# EAGLE board AllOfTheAbove7x_Edits (EAGLE 7.7.0)

Size 180.66 x 105.08 mm. Coordinates in mm from the lower left corner, seen from the top.
Copper layers (1*16): Top 0.035mm / dielectric 1.5mm / Bottom 0.035mm
Design rules "default": minimum track width 6mil, minimum drill 0.35mm, track to track 6mil, track to pad 6mil, pad to pad 6mil, via to via 6mil, smd to smd 6mil, copper to edge 40mil, drill to drill 6mil, minimum pad ring 10mil, minimum via ring 8mil, stop-mask expansion 4mil, vias tented up to drill 0mil, thermal gap 10mil
Net classes: 1 power: width 0.381 mm

## Footprints (pad centres in the part's own frame; a part is rotated, then mirrored left to right if it is on the bottom)
C0603 = smd 0.889 x 0.889: 1 -0.762,0; 2 0.762,0
CASE-A_3216 = smd 1.27 x 1.27: + -1.27,0; - 1.27,0
DO-214AC = smd 2.5 x 1.7: 1 -2,0; 2 2,0
LL-34 = smd 1.524 x 1.676: A -1.524,0; C 1.524,0
SO08 = smd 0.6 x 2.2: 1 -1.905,-2.6; 2 -0.635,-2.6; 3 0.635,-2.6; 4 1.905,-2.6; 5 1.905,2.6; 6 0.635,2.6; 7 -0.635,2.6; 8 -1.905,2.6
1X03 = drill 1.016 long: 1 -2.54,0; 2 0,0; 3 2.54,0
ALPS_POT_SQUAREHOLES = drill 1: P$1 -2.5,-7.5; P$2 0,-7.5; P$3 2.58,-7.5 | smd 2.5 x 2: P$4 -4.75,0; P$5 4.75,0 | smd 2.5 x 2 bottom: P$6 -4.75,0; P$7 4.75,0
R0603 = smd 0.889 x 0.889: 1 -0.762,0; 2 0.762,0
153CLV-0505 = smd 3 x 1.6: + 2.2,0; - -2.2,0
SOT23-BEC = smd 1 x 1.4: B -0.95,-1.1; C 0,1.1; E 0.95,-1.1
TO252 = smd 1 x 1.6: 1 -2.28,-4.8; 2 2.28,-4.8 | smd 5.4 x 6.2: 3 0,2.5
TSSOP14 = smd 0.305 x 0.991: 1 -1.95,-2.918; 2 -1.3,-2.918; 3 -0.65,-2.918; 4 0,-2.918; 5 0.65,-2.918; 6 1.3,-2.918; 7 1.95,-2.918; 8 1.95,2.918; 9 1.3,2.918; 10 0.65,2.918; 11 0,2.918; 12 -0.65,2.918; 13 -1.3,2.918; 14 -1.95,2.918
SO16 = smd 0.6 x 2.2: 1 -4.445,-2.6; 2 -3.175,-2.6; 3 -1.905,-2.6; 4 -0.635,-2.6; 5 0.635,-2.6; 6 1.905,-2.6; 7 3.175,-2.6; 8 4.445,-2.6; 9 4.445,2.6; 10 3.175,2.6; 11 1.905,2.6; 12 0.635,2.6; 13 -0.635,2.6; 14 -1.905,2.6; 15 -3.175,2.6; 16 -4.445,2.6
3.5MM-JACK-SWITCH-13MM-NOHOLES = smd 1.95 x 3.85 bottom: RING_B@1 -3.7,0; SWITCH_B@1 3.7,0 | smd 1.95 x 3.85: RING_T@3 -3.7,0; SWITCH_T@3 3.7,0 | smd 3.85 x 1.95 bottom: SECOND_B@1 0,-3.5; TIP_B@1 0,4.5 | smd 3.85 x 1.95: SECOND_T@3 0,-3.5; TIP_T@3 0,4.5
2X3-SHROUDED = drill 1.016 pad 1.88 octagon: 1 -1.27,2.54; 2 1.27,2.54; 3 -1.27,0; 4 1.27,0; 5 -1.27,-2.54; 6 1.27,-2.54
TC33X = smd 1.2 x 1.2: 1 -1,-1.825; 3 1,-1.825 | smd 1.5 x 1.6: 2 0,1.5
POWER_16_SHROUDED = drill 1.016 pad 1.88 square: 1 -8.89,-1.27 | drill 1.016 pad 1.88: 2 -8.89,1.27; 3 -6.35,-1.27; 4 -6.35,1.27; 5 -3.81,-1.27; 6 -3.81,1.27; 7 -1.27,-1.27; 8 -1.27,1.27; 9 1.27,-1.27; 10 1.27,1.27; 11 3.81,-1.27; 12 3.81,1.27; 13 6.35,-1.27; 14 6.35,1.27; 15 8.89,-1.27; 16 8.89,1.27
SOT-323 = smd 0.7 x 0.9: ANODE -0.65,-0.95; CATHODE 0,0.95; NC 0.65,-0.95
SOT23 = smd 1 x 1.4: 1 -0.95,-1.1; 2 0.95,-1.1; 3 0,1.1
POWERTESTPAD = drill 1 pad 2: P$1 0,0 | smd 2 x 1.5: P$2 0,-0.75 | smd 2 x 1.5 bottom: P$3 0,-0.75
BYPASSBOARD = drill 0.8 long: 12V 31.75,15.24; GND 34.29,5.08; GND2 138.43,15.24; GND3 140.97,5.08 | drill 0.8 square: P$1 31.75,5.08 | drill 0.8: P$2 31.75,10.16; P$3 31.75,7.62; P$4 31.75,12.7; P$5 34.29,15.24; P$6 34.29,10.16; P$7 34.29,12.7; P$8 34.29,7.62; P$9 104.14,5.08; P$10 104.14,10.16; P$11 104.14,7.62; P$12 104.14,12.7; P$13 138.43,5.08; P$14 138.43,10.16; P$15 138.43,7.62; P$16 138.43,12.7; P$17 140.97,15.24; P$18 140.97,10.16; P$19 140.97,12.7; P$20 140.97,7.62
GROUNDLOOP = drill 0.8 offset: P$1 1.27,0; P$2 -1.27,0
FENIXINTERNALCONNECTIONPAD = smd 0.635 x 1.27 bottom: P$1 0,0
TESTPAD_DUAL_PTH = drill 0.8 square: P$1 -1.27,0 | drill 0.8: P$2 1.27,0
SOT23' = smd 0.6 x 0.7: P$1 -0.85,-1; P$2 0.85,-1; P$3 0,1

## Placement (x,y rotation side)
C1  100n  [C0603]  not placed on the board
C2  100n  [C0603]  not placed on the board
C3  10u  [CASE-A_3216]  not placed on the board
C4  10u  [CASE-A_3216]  not placed on the board
C5  [C0603]  not placed on the board
C6  [C0603]  not placed on the board
C7  [CASE-A_3216]  not placed on the board
C8  [CASE-A_3216]  not placed on the board
C9  100n  [C0603]  not placed on the board
C10  100n  [C0603]  not placed on the board
C11  100n  [C0603]  not placed on the board
C12  100n  [C0603]  not placed on the board
D1  1n4001  [DO-214AC]  not placed on the board
D2  1n4001  [DO-214AC]  not placed on the board
DIST+1:C22  1nF  [C0603]  not placed on the board
DIST+1:C23  10nF  [C0603]  not placed on the board
DIST+1:C24  100n  [C0603]  not placed on the board
DIST+1:C25  100n  [C0603]  not placed on the board
DIST+1:C26  47nF  [C0603]  not placed on the board
DIST+1:C27  1uF  [C0603]  not placed on the board
DIST+1:C28  1nF  [C0603]  not placed on the board
DIST+1:D11  1n34a  [LL-34]  not placed on the board
DIST+1:D12  1n34a  [LL-34]  not placed on the board
DIST+1:IC5  UA741D  [SO08]  not placed on the board
DIST+1:JP4  [1X03]  not placed on the board
DIST+1:JP5  [1X03]  not placed on the board
DIST+1:JP6  [1X03]  not placed on the board
DIST+1:R22  10KB  [ALPS_POT_SQUAREHOLES]  40.3,37.64 0 top
DIST+1:R23  1MC  [ALPS_POT_SQUAREHOLES]  40.3,57.96 0 top
DIST+1:R24  10K  [ALPS_POT_SQUAREHOLES]  40.3,78.28 0 top
DIST+1:R25  10K  [R0603]  not placed on the board
DIST+1:R26  4.7K  [R0603]  not placed on the board
DIST+1:R27  1M  [R0603]  not placed on the board
DIST+1:R28  5.6K  [R0603]  not placed on the board
DIST+1:R72  1M  [R0603]  not placed on the board
FUZZFACE1:C1  20uF  [153CLV-0505]  not placed on the board
FUZZFACE1:C28  2.2uF  [153CLV-0505]  not placed on the board
FUZZFACE1:C42  10nF  [C0603]  not placed on the board
FUZZFACE1:JP1  [1X03]  not placed on the board
FUZZFACE1:JP2  [1X03]  not placed on the board
FUZZFACE1:Q1  MMBT3906LT1SMD  [SOT23-BEC]  not placed on the board
FUZZFACE1:Q2  MMBT3906LT1SMD  [SOT23-BEC]  not placed on the board
FUZZFACE1:R41  100K  [R0603]  not placed on the board
FUZZFACE1:R42  500KA  [ALPS_POT_SQUAREHOLES]  91.1,65.58 0 top
FUZZFACE1:R43  1KB  [ALPS_POT_SQUAREHOLES]  91.1,40.18 0 top
FUZZFACE1:R44  8.2K  [R0603]  not placed on the board
FUZZFACE1:R45  33K  [R0603]  not placed on the board
FUZZFACE1:R46  470R  [R0603]  not placed on the board
IC1  7809DT  [TO252]  83.48,24.94 180 top
IC2  TL074TSSOP14  [TSSOP14]  not placed on the board
IC6  TL074TSSOP14  [TSSOP14]  not placed on the board
INPUTS1:C1  100n  [C0603]  not placed on the board
INPUTS1:C2  100n  [C0603]  not placed on the board
INPUTS1:C3  10uF  [153CLV-0505]  not placed on the board
INPUTS1:C4  10pF  [C0603]  not placed on the board
INPUTS1:C9  100n  [C0603]  not placed on the board
INPUTS1:C10  100n  [C0603]  not placed on the board
INPUTS1:C22  10pF  [C0603]  not placed on the board
INPUTS1:C23  10pF  [C0603]  not placed on the board
INPUTS1:C24  47pF  [C0603]  not placed on the board
INPUTS1:C26  100n  [C0603]  not placed on the board
INPUTS1:C27  100n  [C0603]  not placed on the board
INPUTS1:C28  10uF  [153CLV-0505]  not placed on the board
INPUTS1:C29  10uF  [153CLV-0505]  not placed on the board
INPUTS1:D15  [LL-34]  not placed on the board
INPUTS1:D17  1N4148  [LL-34]  not placed on the board
INPUTS1:IC1  TL072  [SO08]  not placed on the board
INPUTS1:IC2  TL072  [SO08]  not placed on the board
INPUTS1:IC5  LM13700M  [SO16]  not placed on the board
INPUTS1:IC6  TL072  [SO08]  not placed on the board
INPUTS1:J1  JACK  [3.5MM-JACK-SWITCH-13MM-NOHOLES]  7.28,42.72 0 top
INPUTS1:J17  JACK  [3.5MM-JACK-SWITCH-13MM-NOHOLES]  7.28,27.48 0 top
INPUTS1:Q1  MMBT3906LT1SMD  [SOT23-BEC]  not placed on the board
INPUTS1:R1  100K  [R0603]  not placed on the board
INPUTS1:R2  100K  [R0603]  not placed on the board
INPUTS1:R3  100k  [R0603]  not placed on the board
INPUTS1:R4  4.7K  [R0603]  not placed on the board
INPUTS1:R5  10R  [R0603]  not placed on the board
INPUTS1:R6  10R  [R0603]  not placed on the board
INPUTS1:R7  100K  [R0603]  not placed on the board
INPUTS1:R8  100K  [R0603]  not placed on the board
INPUTS1:R9  330K  [R0603]  not placed on the board
INPUTS1:R10  1K  [R0603]  not placed on the board
INPUTS1:R11  100k  [R0603]  not placed on the board
INPUTS1:R22  1M  [R0603]  not placed on the board
INPUTS1:R23  150K  [R0603]  not placed on the board
INPUTS1:R24  10K  [R0603]  not placed on the board
INPUTS1:R25  470R  [R0603]  not placed on the board
INPUTS1:R26  1K  [R0603]  not placed on the board
INPUTS1:R27  100K  [R0603]  not placed on the board
INPUTS1:R28  1K  [R0603]  not placed on the board
INPUTS1:R30  10K  [R0603]  not placed on the board
INPUTS1:R31  100K  [R0603]  not placed on the board
INPUTS1:R32  100K  [R0603]  not placed on the board
INPUTS1:R33  330K  [R0603]  not placed on the board
INPUTS1:R69  100K Linear  [ALPS_POT_SQUAREHOLES]  19.98,42.72 0 top
INPUTS1:U$13  HEADPHONE  [2X3-SHROUDED]  not placed on the board
INPUTS1:U$17  100k  [TC33X]  not placed on the board
INPUTS1:U$18  100k  [TC33X]  not placed on the board
J1  JACK  [3.5MM-JACK-SWITCH-13MM-NOHOLES]  174.92,27.48 0 top
J2  POWERSHROUDED  [POWER_16_SHROUDED]  70.78,13.51 270 bottom
J3  JACK  [3.5MM-JACK-SWITCH-13MM-NOHOLES]  174.92,63.04 0 top
J4  JACK  [3.5MM-JACK-SWITCH-13MM-NOHOLES]  45.38,98.6 0 top
J5  JACK  [3.5MM-JACK-SWITCH-13MM-NOHOLES]  55.54,96.06 0 top
J6  JACK  [3.5MM-JACK-SWITCH-13MM-NOHOLES]  9.82,98.6 0 top
J7  JACK  [3.5MM-JACK-SWITCH-13MM-NOHOLES]  30.14,98.6 0 top
J8  JACK  [3.5MM-JACK-SWITCH-13MM-NOHOLES]  19.98,96.06 0 top
J9  JACK  [3.5MM-JACK-SWITCH-13MM-NOHOLES]  65.7,98.6 0 top
J10  JACK  [3.5MM-JACK-SWITCH-13MM-NOHOLES]  174.92,78.28 0 top
J11  JACK  [3.5MM-JACK-SWITCH-13MM-NOHOLES]  80.94,98.6 0 top
J12  JACK  [3.5MM-JACK-SWITCH-13MM-NOHOLES]  91.1,96.06 0 top
J13  JACK  [3.5MM-JACK-SWITCH-13MM-NOHOLES]  101.26,98.6 0 top
J14  JACK  [3.5MM-JACK-SWITCH-13MM-NOHOLES]  116.5,98.6 0 top
J15  JACK  [3.5MM-JACK-SWITCH-13MM-NOHOLES]  126.66,96.06 0 top
J16  JACK  [3.5MM-JACK-SWITCH-13MM-NOHOLES]  136.82,98.6 0 top
J17  JACK  [3.5MM-JACK-SWITCH-13MM-NOHOLES]  152.06,98.6 0 top
J18  JACK  [3.5MM-JACK-SWITCH-13MM-NOHOLES]  162.22,96.06 0 top
J19  JACK  [3.5MM-JACK-SWITCH-13MM-NOHOLES]  172.38,98.6 0 top
MUFF1:C1  1uF  [153CLV-0505]  not placed on the board
MUFF1:C2  1uF  [153CLV-0505]  not placed on the board
MUFF1:C28  1uF  [153CLV-0505]  not placed on the board
MUFF1:C44  470pF  [C0603]  not placed on the board
MUFF1:C45  1uF  [C0603]  not placed on the board
MUFF1:C46  100nF  [C0603]  not placed on the board
MUFF1:C47  470pF  [C0603]  not placed on the board
MUFF1:C49  100nF  [C0603]  not placed on the board
MUFF1:C50  470pF  [C0603]  not placed on the board
MUFF1:C52  4nF  [C0603]  not placed on the board
MUFF1:C53  100nF  [C0603]  not placed on the board
MUFF1:C54  100nF  [C0603]  not placed on the board
MUFF1:C55  10nF  [C0603]  not placed on the board
MUFF1:D1  BAS16W  [SOT-323]  not placed on the board
MUFF1:D2  BAS16W  [SOT-323]  not placed on the board
MUFF1:D3  BAS16W  [SOT-323]  not placed on the board
MUFF1:D4  BAS16W  [SOT-323]  not placed on the board
MUFF1:R47  39K  [R0603]  not placed on the board
MUFF1:R48  47K  [R0603]  not placed on the board
MUFF1:R49  470K  [R0603]  not placed on the board
MUFF1:R50  100R  [R0603]  not placed on the board
MUFF1:R51  10K  [R0603]  not placed on the board
MUFF1:R52  1K  [R0603]  not placed on the board
MUFF1:R53  10K  [R0603]  not placed on the board
MUFF1:R54  100K  [R0603]  not placed on the board
MUFF1:R55  150R  [R0603]  not placed on the board
MUFF1:R56  470K  [R0603]  not placed on the board
MUFF1:R57  10K  [R0603]  not placed on the board
MUFF1:R58  10K  [R0603]  not placed on the board
MUFF1:R59  100K  [R0603]  not placed on the board
MUFF1:R60  150R  [R0603]  not placed on the board
MUFF1:R61  470K  [R0603]  not placed on the board
MUFF1:R62  10K  [R0603]  not placed on the board
MUFF1:R63  39K  [R0603]  not placed on the board
MUFF1:R64  22K  [R0603]  not placed on the board
MUFF1:R65  100K  [R0603]  not placed on the board
MUFF1:R66  430K  [R0603]  not placed on the board
MUFF1:R67  15K  [R0603]  not placed on the board
MUFF1:R68  3.3K  [R0603]  not placed on the board
MUFF1:R69  100KB  [ALPS_POT_SQUAREHOLES]  116.5,75.74 0 top
MUFF1:R70  100KB  [ALPS_POT_SQUAREHOLES]  116.5,30.02 0 top
MUFF1:R71  100KB  [ALPS_POT_SQUAREHOLES]  116.5,52.88 0 top
MUFF1:T1  2n3904  [SOT23-BEC]  not placed on the board
MUFF1:T2  2n3904  [SOT23-BEC]  not placed on the board
MUFF1:T3  2n3904  [SOT23-BEC]  not placed on the board
MUFF1:T4  2n3904  [SOT23-BEC]  not placed on the board
PCB1  EURORACK_PCB5STOMP  [EURORACK36HP_5STOMP]  -0.34,-3 0 top
R1  100k  [R0603]  not placed on the board
R2  100k  [R0603]  not placed on the board
R3  100k  [R0603]  not placed on the board
R4  100k  [R0603]  not placed on the board
R5  100k  [R0603]  not placed on the board
R6  100k  [R0603]  not placed on the board
R7  100k  [R0603]  not placed on the board
R8  100k  [R0603]  not placed on the board
R9  100k  [R0603]  not placed on the board
R10  100k  [R0603]  not placed on the board
R11  100k  [R0603]  not placed on the board
R12  100k  [R0603]  not placed on the board
R13  100k  [R0603]  not placed on the board
R14  100k  [R0603]  not placed on the board
R15  100k  [R0603]  not placed on the board
R16  100k  [R0603]  not placed on the board
R17  100k  [R0603]  not placed on the board
R18  100k  [R0603]  not placed on the board
R19  100k  [R0603]  not placed on the board
R20  100k  [R0603]  not placed on the board
R21  100k  [R0603]  not placed on the board
R22  100k  [R0603]  not placed on the board
R23  100k  [R0603]  not placed on the board
R24  100k  [R0603]  not placed on the board
R25  100k  [R0603]  91.1,35.1 0 top
R26  100k  [R0603]  86.02,37.64 0 top
RAT1:C1  4.7uF  [153CLV-0505]  not placed on the board
RAT1:C2  2.2uF  [153CLV-0505]  not placed on the board
RAT1:C3  4.7uF  [153CLV-0505]  not placed on the board
RAT1:C28  1uF  [153CLV-0505]  not placed on the board
RAT1:C29  22nF  [C0603]  not placed on the board
RAT1:C30  1nF  [C0603]  not placed on the board
RAT1:C31  100pF  [C0603]  not placed on the board
RAT1:C35  3.3nF  [C0603]  not placed on the board
RAT1:C36  22nF  [C0603]  not placed on the board
RAT1:C38  100n  [C0603]  not placed on the board
RAT1:C39  100n  [C0603]  not placed on the board
RAT1:D1  BAS16W  [SOT-323]  not placed on the board
RAT1:D2  BAS16W  [SOT-323]  not placed on the board
RAT1:IC6  UA741D  [SO08]  not placed on the board
RAT1:JP1  [1X03]  not placed on the board
RAT1:JP2  [1X03]  not placed on the board
RAT1:JP3  [1X03]  not placed on the board
RAT1:Q1  SST201  [SOT23]  not placed on the board
RAT1:R29  100KA  [ALPS_POT_SQUAREHOLES]  65.7,75.74 0 top
RAT1:R30  100KA  [ALPS_POT_SQUAREHOLES]  65.7,30.02 0 top
RAT1:R31  100KA  [ALPS_POT_SQUAREHOLES]  65.7,52.88 0 top
RAT1:R32  1M  [R0603]  not placed on the board
RAT1:R33  1K  [R0603]  not placed on the board
RAT1:R34  1M  [R0603]  not placed on the board
RAT1:R35  560R  [R0603]  not placed on the board
RAT1:R36  47R  [R0603]  not placed on the board
RAT1:R37  1K  [R0603]  not placed on the board
RAT1:R38  1.5K  [R0603]  not placed on the board
RAT1:R39  1M  [R0603]  not placed on the board
RAT1:R40  10K  [R0603]  not placed on the board
U$13  VOLTAGETESTPAD  [POWERTESTPAD]  91.1,32.56 0 top
U$22  5STOMPBOARD  [BYPASSBOARD]  4.74,-3 0 top
U$23  HEADPHONEHOLE_BIGGAP  [HEADPHONEHOLE_GAP]  9.82,73.2 180 top
U$41  VOLTAGETESTPAD  [POWERTESTPAD]  96.18,40.18 0 top
U$42  VOLTAGETESTPAD  [POWERTESTPAD]  88.56,32.56 0 top
U$43  VOLTAGETESTPAD  [POWERTESTPAD]  83.48,32.56 0 top
U$44  VOLTAGETESTPAD  [POWERTESTPAD]  86.02,32.56 0 top
U$48  GNDLOOP  [GROUNDLOOP]  177.46,2.08 180 top
U$49  GNDLOOP  [GROUNDLOOP]  177.46,98.6 0 top
U$50  GNDLOOP  [GROUNDLOOP]  4.74,2.08 180 top
VCA1:C1  100n  [C0603]  not placed on the board
VCA1:C2  100n  [C0603]  not placed on the board
VCA1:C9  100n  [C0603]  not placed on the board
VCA1:C10  100n  [C0603]  not placed on the board
VCA1:C22  10pF  [C0603]  not placed on the board
VCA1:D17  1N4148  [LL-34]  not placed on the board
VCA1:IC5  LM13700M  [SO16]  not placed on the board
VCA1:IC6  TL072  [SO08]  not placed on the board
VCA1:Q1  MMBT3906LT1SMD  [SOT23-BEC]  not placed on the board
VCA1:R22  4.7K  [R0603]  not placed on the board
VCA1:R23  10R  [R0603]  not placed on the board
VCA1:R24  10R  [R0603]  not placed on the board
VCA1:R25  100K  [R0603]  not placed on the board
VCA1:R26  100K  [R0603]  not placed on the board
VCA1:R27  100K  [R0603]  not placed on the board
VCA1:R28  1K  [R0603]  not placed on the board
VCA1:R30  10K  [R0603]  not placed on the board
VCA1:R31  100K  [R0603]  not placed on the board
VCA1:R32  100K  [R0603]  not placed on the board
VCA1:R33  330K  [R0603]  not placed on the board
VCA1:R69  [ALPS_POT_SQUAREHOLES]  162.22,63.04 0 top
VCA1:U$7  100k  [TC33X]  not placed on the board
VCA1:U$8  100k  [TC33X]  not placed on the board
WAVESHAPER1:12V  POWER12V  [FENIXINTERNALCONNECTIONPAD]  not placed on the board
WAVESHAPER1:-12V  POWER-12V  [FENIXINTERNALCONNECTIONPAD]  not placed on the board
WAVESHAPER1:C1  100n  [C0603]  not placed on the board
WAVESHAPER1:C2  100n  [C0603]  not placed on the board
WAVESHAPER1:C3  100n  [C0603]  not placed on the board
WAVESHAPER1:C4  100n  [C0603]  not placed on the board
WAVESHAPER1:C5  100n  [C0603]  not placed on the board
WAVESHAPER1:C6  100n  [C0603]  not placed on the board
WAVESHAPER1:C7  33p  [C0603]  not placed on the board
WAVESHAPER1:C8  220p  [C0603]  not placed on the board
WAVESHAPER1:C9  33p  [C0603]  not placed on the board
WAVESHAPER1:C10  33p  [C0603]  not placed on the board
WAVESHAPER1:C11  33p  [C0603]  not placed on the board
WAVESHAPER1:C12  33p  [C0603]  not placed on the board
WAVESHAPER1:C13  100n  [C0603]  not placed on the board
WAVESHAPER1:C14  680n  [C0603]  not placed on the board
WAVESHAPER1:C15  33p FIX  [C0603]  not placed on the board
WAVESHAPER1:C16  33p FIX  [C0603]  not placed on the board
WAVESHAPER1:C24  100n  [C0603]  not placed on the board
WAVESHAPER1:C25  100n  [C0603]  not placed on the board
WAVESHAPER1:D1  BAS16W  [SOT-323]  not placed on the board
WAVESHAPER1:D2  BAS16W  [SOT-323]  not placed on the board
WAVESHAPER1:D3  BAS16W  [SOT-323]  not placed on the board
WAVESHAPER1:D4  BAS16W  [SOT-323]  not placed on the board
WAVESHAPER1:D5  BAS16W  [SOT-323]  not placed on the board
WAVESHAPER1:D6  BAS16W  [SOT-323]  not placed on the board
WAVESHAPER1:D7  BAS16W  [SOT-323]  not placed on the board
WAVESHAPER1:D8  BAS16W  [SOT-323]  not placed on the board
WAVESHAPER1:D9  BAS16W  [SOT-323]  not placed on the board
WAVESHAPER1:D10  BAS16W  [SOT-323]  not placed on the board
WAVESHAPER1:D11  BAS16W  [SOT-323]  not placed on the board
WAVESHAPER1:D12  BAS16W  [SOT-323]  not placed on the board
WAVESHAPER1:GND  POWERGND  [FENIXINTERNALCONNECTIONPAD]  not placed on the board
WAVESHAPER1:IC1  TL074TSSOP14  [TSSOP14]  not placed on the board
WAVESHAPER1:IC2  TL074TSSOP14  [TSSOP14]  not placed on the board
WAVESHAPER1:IC3  LM13700M  [SO16]  not placed on the board
WAVESHAPER1:IC5  TL072  [SO08]  not placed on the board
WAVESHAPER1:J1  JACK  [3.5MM-JACK-SWITCH-13MM-NOHOLES]  136.82,78.28 0 top
WAVESHAPER1:J2  JACK  [3.5MM-JACK-SWITCH-13MM-NOHOLES]  146.98,78.28 0 top
WAVESHAPER1:J3  JACK  [3.5MM-JACK-SWITCH-13MM-NOHOLES]  174.92,42.72 0 top
WAVESHAPER1:Q2  MMBT3906LT1SMD  [SOT23-BEC]  not placed on the board
WAVESHAPER1:R1  100KB Lin  [ALPS_POT_SQUAREHOLES]  141.9,57.96 0 top
WAVESHAPER1:R2  10KB Lin  [ALPS_POT_SQUAREHOLES]  141.9,37.64 0 top
WAVESHAPER1:R3  1k  [R0603]  not placed on the board
WAVESHAPER1:R4  14  [R0603]  not placed on the board
WAVESHAPER1:R5  470K  [R0603]  not placed on the board
WAVESHAPER1:R6  4K7  [R0603]  not placed on the board
WAVESHAPER1:R7  100  [R0603]  not placed on the board
WAVESHAPER1:R8  100  [R0603]  not placed on the board
WAVESHAPER1:R9  470K  [R0603]  not placed on the board
WAVESHAPER1:R10  22K  [R0603]  not placed on the board
WAVESHAPER1:R11  33K  [R0603]  not placed on the board
WAVESHAPER1:R12  4M7  [R0603]  not placed on the board
WAVESHAPER1:R13  10K  [R0603]  not placed on the board
WAVESHAPER1:R14  47K  [R0603]  not placed on the board
WAVESHAPER1:R15  33K  [R0603]  not placed on the board
WAVESHAPER1:R16  33K  [R0603]  not placed on the board
WAVESHAPER1:R17  100K  [R0603]  not placed on the board
WAVESHAPER1:R18  100K  [R0603]  not placed on the board
WAVESHAPER1:R19  100K  [R0603]  not placed on the board
WAVESHAPER1:R20  100K  [R0603]  not placed on the board
WAVESHAPER1:R21  100K  [R0603]  not placed on the board
WAVESHAPER1:R22  100  [R0603]  not placed on the board
WAVESHAPER1:R23  100K  [R0603]  not placed on the board
WAVESHAPER1:R24  10K  [R0603]  not placed on the board
WAVESHAPER1:R25  220K  [R0603]  not placed on the board
WAVESHAPER1:R26  10K  [R0603]  not placed on the board
WAVESHAPER1:R27  6K8  [R0603]  not placed on the board
WAVESHAPER1:R28  100K  [R0603]  not placed on the board
WAVESHAPER1:R29  33K  [R0603]  not placed on the board
WAVESHAPER1:R30  100K  [R0603]  not placed on the board
WAVESHAPER1:R31  33K  [R0603]  not placed on the board
WAVESHAPER1:R32  100K  [R0603]  not placed on the board
WAVESHAPER1:R33  33K  [R0603]  not placed on the board
WAVESHAPER1:R34  33K  [R0603]  not placed on the board
WAVESHAPER1:R35  100K  [R0603]  not placed on the board
WAVESHAPER1:R36  100K  [R0603]  not placed on the board
WAVESHAPER1:R37  27k  [R0603]  not placed on the board
WAVESHAPER1:R38  150k  [R0603]  not placed on the board
WAVESHAPER1:R39  1k  [R0603]  not placed on the board
WAVESHAPER1:R40  200k  [R0603]  not placed on the board
WAVESHAPER1:R41  200k  [R0603]  not placed on the board
WAVESHAPER1:R42  47k  [R0603]  not placed on the board
WAVESHAPER1:R43  47k  [R0603]  not placed on the board
WAVESHAPER1:R44  2.2k  [R0603]  not placed on the board
WAVESHAPER1:R45  18k  [R0603]  not placed on the board
WAVESHAPER1:R46  18k  [R0603]  not placed on the board
WAVESHAPER1:R47  10k  [ALPS_POT_SQUAREHOLES]  162.22,42.72 0 top
WAVESHAPER1:R48  14k  [R0603]  not placed on the board
WAVESHAPER1:T1  3906  [SOT23-BEC]  not placed on the board
WAVESHAPER1:U$3  TESTPOINT_DUAL_PTH  [TESTPAD_DUAL_PTH]  not placed on the board
WAVESHAPER1:U$11  BAT54S  [SOT23']  not placed on the board
WAVESHAPER1:U$24  50K  [TC33X]  not placed on the board
WAVESHAPER1:WSOUT  SIGNALOUT  [FENIXINTERNALCONNECTIONPAD]  not placed on the board

## Library data of the parts
C1 C2 C5 C6 C9-C12 D1 D2 DIST+1:C22-DIST+1:C28 DIST+1:D11 DIST+1:D12 DIST+1:R25-DIST+1:R28 DIST+1:R72 FUZZFACE1:C42 FUZZFACE1:R41 FUZZFACE1:R44-FUZZFACE1:R46 INPUTS1:C1 INPUTS1:C2 INPUTS1:C4 INPUTS1:C9 INPUTS1:C10 INPUTS1:C22-INPUTS1:C24 INPUTS1:C26 INPUTS1:C27 INPUTS1:D15 INPUTS1:D17 INPUTS1:R1-INPUTS1:R11 INPUTS1:R22-INPUTS1:R28 INPUTS1:R30-INPUTS1:R33 MUFF1:C44-MUFF1:C47 MUFF1:C49 MUFF1:C50 MUFF1:C52-MUFF1:C55 MUFF1:R47-MUFF1:R68 R1-R26 RAT1:C29-RAT1:C31 RAT1:C35 RAT1:C36 RAT1:C38 RAT1:C39 RAT1:R32-RAT1:R40 VCA1:C1 VCA1:C2 VCA1:C9 VCA1:C10 VCA1:C22 VCA1:D17 VCA1:R22-VCA1:R28 VCA1:R30-VCA1:R33 WAVESHAPER1:C1-WAVESHAPER1:C16 WAVESHAPER1:C24 WAVESHAPER1:C25 WAVESHAPER1:R3-WAVESHAPER1:R46 WAVESHAPER1:R48 = OPL
C3 C4 C7 C8 IC2 IC6 INPUTS1:IC1 INPUTS1:IC2 INPUTS1:IC6 J2 PCB1 U$22 U$23 VCA1:IC6 WAVESHAPER1:IC1 WAVESHAPER1:IC2 WAVESHAPER1:IC5 = EurorackModularParts
DIST+1:IC5 RAT1:IC6 = linear
DIST+1:JP4-DIST+1:JP6 FUZZFACE1:JP1 FUZZFACE1:JP2 RAT1:JP1-RAT1:JP3 = pinhead
DIST+1:R22 MUFF1:R70 RAT1:R30 = EurorackModularParts; DESC: Tone
DIST+1:R23 FUZZFACE1:R43 MUFF1:R71 RAT1:R31 = EurorackModularParts; DESC: Distortion
DIST+1:R24 FUZZFACE1:R42 MUFF1:R69 RAT1:R29 = EurorackModularParts; DESC: Volume
FUZZFACE1:C1 FUZZFACE1:C28 INPUTS1:C3 INPUTS1:C28 INPUTS1:C29 INPUTS1:U$17 INPUTS1:U$18 MUFF1:C1 MUFF1:C2 MUFF1:C28 RAT1:C1-RAT1:C3 RAT1:C28 VCA1:U$7 VCA1:U$8 = adafruit
FUZZFACE1:Q1 FUZZFACE1:Q2 INPUTS1:Q1 VCA1:Q1 WAVESHAPER1:Q2 = transistor-pnp
IC1 = adafruit@1
INPUTS1:IC5 VCA1:IC5 WAVESHAPER1:IC3 = ota
INPUTS1:J1 = EurorackModularParts; DESC: Drive CV
INPUTS1:J17 = EurorackModularParts; DESC: Master Input
INPUTS1:R69 = EurorackModularParts; DESC: Drive
INPUTS1:U$13 = SparkFun-Connectors
J1 = EurorackModularParts; DESC: Cross Output
J3 = EurorackModularParts; DESC: Master Output
J4 = EurorackModularParts; DESC: Input B
J5 = EurorackModularParts; DESC: Difference B
J6 = EurorackModularParts; DESC: Input A
J7 = EurorackModularParts; DESC: Output A
J8 = EurorackModularParts; DESC: Difference A
J9 = EurorackModularParts; DESC: Output B
J10 = EurorackModularParts; DESC: Master Difference
J11 = EurorackModularParts; DESC: Input C
J12 = EurorackModularParts; DESC: Difference C
J13 = EurorackModularParts; DESC: Output C
J14 = EurorackModularParts; DESC: Input D
J15 = EurorackModularParts; DESC: Difference D
J16 = EurorackModularParts; DESC: Output D
J17 = EurorackModularParts; DESC: Input E
J18 = EurorackModularParts; DESC: Difference E
J19 = EurorackModularParts; DESC: Output E
MUFF1:D1-MUFF1:D4 RAT1:D1 RAT1:D2 U$48-U$50 WAVESHAPER1:12V WAVESHAPER1:-12V WAVESHAPER1:D1-WAVESHAPER1:D12 WAVESHAPER1:GND WAVESHAPER1:U$3 WAVESHAPER1:U$11 WAVESHAPER1:WSOUT = FenixBase
MUFF1:T1-MUFF1:T4 = transistor-neu-to92
RAT1:Q1 = transistor-fet
U$13 = FenixBase; DESC: 12V
U$41 = FenixBase; DESC: -12V
U$42 = FenixBase; DESC: 9V
U$43 = FenixBase; DESC: GND
U$44 = FenixBase; DESC: 4.5V
VCA1:R69 = EurorackModularParts; DESC: Post-gain
WAVESHAPER1:J1 WAVESHAPER1:R1 = EurorackModularParts; DESC: Mod
WAVESHAPER1:J2 = EurorackModularParts; DESC: Bias
WAVESHAPER1:J3 WAVESHAPER1:R47 = EurorackModularParts; DESC: Wet/Dry
WAVESHAPER1:R2 = EurorackModularParts; DESC: Level
WAVESHAPER1:T1 = transistor
WAVESHAPER1:U$24 = adafruit; DESC: Offset

## Nets
4.5V: DIST+1:R72.2 R25.1 R26.2 RAT1:R34.2 U$44.P$1 U$44.P$2 U$44.P$3
9V: C5.2 C7.+ DIST+1:JP4.1 FUZZFACE1:C1.+ FUZZFACE1:JP2.3 FUZZFACE1:Q1.E FUZZFACE1:R42.P$1 FUZZFACE1:R43.P$1 IC1.2 MUFF1:R51.1 MUFF1:R57.1 MUFF1:R62.1 MUFF1:R66.2 MUFF1:R67.2 R25.2 RAT1:JP2.1 RAT1:Q1.1 U$42.P$1 U$42.P$2 U$42.P$3
12V: C1.2 C3.+ C6.2 C8.+ C9.2 C11.2 D1.2 DIST+1:C24.2 DIST+1:JP4.3 IC1.1 IC2.4 IC6.4 INPUTS1:C1.2 INPUTS1:C9.2 INPUTS1:C26.2 INPUTS1:IC1.8 INPUTS1:IC2.8 INPUTS1:IC5.11 INPUTS1:IC6.8 INPUTS1:J1.SWITCH_B@1 INPUTS1:J1.SWITCH_T@3 INPUTS1:U$17.3 INPUTS1:U$18.3 RAT1:C38.2 RAT1:JP2.3 U$13.P$1 U$13.P$2 U$13.P$3 U$22.12V WAVESHAPER1:12V.P$1 WAVESHAPER1:C1.2 WAVESHAPER1:C3.2 WAVESHAPER1:C5.2 WAVESHAPER1:C24.2 WAVESHAPER1:IC1.4 WAVESHAPER1:IC2.4 WAVESHAPER1:IC3.11 WAVESHAPER1:IC5.8 WAVESHAPER1:R2.P$3 WAVESHAPER1:R48.1 WAVESHAPER1:U$24.1
-12V: C2.1 C4.- C10.1 C12.1 D2.1 DIST+1:C25.1 DIST+1:JP5.3 IC2.11 IC6.11 INPUTS1:C2.1 INPUTS1:C10.1 INPUTS1:C27.1 INPUTS1:IC1.4 INPUTS1:IC2.4 INPUTS1:IC5.6 INPUTS1:IC6.4 INPUTS1:U$17.1 INPUTS1:U$18.1 RAT1:C39.1 RAT1:JP3.3 U$41.P$1 U$41.P$2 U$41.P$3 WAVESHAPER1:-12V.P$1 WAVESHAPER1:C2.1 WAVESHAPER1:C4.1 WAVESHAPER1:C6.1 WAVESHAPER1:C25.1 WAVESHAPER1:IC1.11 WAVESHAPER1:IC2.11 WAVESHAPER1:IC3.6 WAVESHAPER1:IC5.4 WAVESHAPER1:R9.2 WAVESHAPER1:R12.1 WAVESHAPER1:U$24.3
DIST+1:N$20: DIST+1:C23.2 DIST+1:R25.2
DIST+1:N$21: DIST+1:IC5.3 DIST+1:JP6.2 DIST+1:R25.1
DIST+1:N$22: DIST+1:C26.2 DIST+1:IC5.2 DIST+1:R27.1
DIST+1:N$23: DIST+1:C26.1 DIST+1:R26.1
DIST+1:N$32: DIST+1:C27.1 DIST+1:IC5.6 DIST+1:R27.2
DIST+1:N$33: DIST+1:R23.P$3 DIST+1:R26.2
DIST+1:N$34: DIST+1:C28.2 DIST+1:D11.C DIST+1:D12.A DIST+1:R22.P$3 DIST+1:R24.P$3
DIST+1:N$35: DIST+1:C27.2 DIST+1:R28.2
DIST+1:N$36: DIST+1:R22.P$1 DIST+1:R22.P$2 DIST+1:R28.1
DIST+1:N$81: DIST+1:IC5.7 DIST+1:JP4.2
DIST+1:N$82: DIST+1:IC5.4 DIST+1:JP5.2
DIST+1:N$87: DIST+1:JP6.1 DIST+1:R72.1
FUZZFACE1:N$53: FUZZFACE1:JP1.3 FUZZFACE1:Q2.E FUZZFACE1:R41.1 FUZZFACE1:R43.P$3
FUZZFACE1:N$54: FUZZFACE1:C28.- FUZZFACE1:JP2.2 FUZZFACE1:Q1.B FUZZFACE1:R41.2
FUZZFACE1:N$55: FUZZFACE1:JP1.2 FUZZFACE1:JP2.1 FUZZFACE1:Q1.C FUZZFACE1:Q2.B FUZZFACE1:R45.2
FUZZFACE1:N$56: FUZZFACE1:C1.- FUZZFACE1:R43.P$2
FUZZFACE1:N$57: FUZZFACE1:C42.2 FUZZFACE1:R42.P$3
FUZZFACE1:N$58: FUZZFACE1:C42.1 FUZZFACE1:R44.1 FUZZFACE1:R46.2
FUZZFACE1:N$59: FUZZFACE1:JP1.1 FUZZFACE1:Q2.C FUZZFACE1:R44.2
GND: C1.1 C2.2 C3.- C4.+ C5.1 C6.1 C7.- C8.- C9.1 C10.2 C11.1 C12.2 DIST+1:C22.2 DIST+1:C24.1 DIST+1:C25.2 DIST+1:C28.1 DIST+1:D11.A DIST+1:D12.C DIST+1:JP5.1 DIST+1:R23.P$1 DIST+1:R23.P$2 DIST+1:R24.P$1 FUZZFACE1:R45.1 FUZZFACE1:R46.1 IC1.3 INPUTS1:C1.1 INPUTS1:C2.2 INPUTS1:C3.- INPUTS1:C9.1 INPUTS1:C10.2 INPUTS1:C23.1 INPUTS1:C26.1 INPUTS1:C27.2 INPUTS1:C29.- INPUTS1:IC6.5 INPUTS1:J1.RING_B@1 INPUTS1:J1.RING_T@3 INPUTS1:J17.RING_B@1 INPUTS1:J17.RING_T@3 INPUTS1:J17.SWITCH_B@1 INPUTS1:J17.SWITCH_T@3 INPUTS1:R5.1 INPUTS1:R6.2 INPUTS1:R8.2 INPUTS1:R9.1 INPUTS1:R22.1 INPUTS1:R23.1 INPUTS1:R30.1 INPUTS1:R69.P$1 INPUTS1:U$13.3 INPUTS1:U$13.4 J1.RING_B@1 J1.RING_T@3 J2.3 J2.4 J2.5 J2.6 J2.7 J2.8 J3.RING_B@1 J3.RING_T@3 J4.RING_B@1 J4.RING_T@3 J5.RING_B@1 J5.RING_T@3 J6.RING_B@1 J6.RING_T@3 J7.RING_B@1 J7.RING_T@3 J8.RING_B@1 J8.RING_T@3 J9.RING_B@1 J9.RING_T@3 J10.RING_B@1 J10.RING_T@3 J11.RING_B@1 J11.RING_T@3 J12.RING_B@1 J12.RING_T@3 J13.RING_B@1 J13.RING_T@3 J14.RING_B@1 J14.RING_T@3 J15.RING_B@1 J15.RING_T@3 J16.RING_B@1 J16.RING_T@3 J17.RING_B@1 J17.RING_T@3 J18.RING_B@1 J18.RING_T@3 J19.RING_B@1 J19.RING_T@3 MUFF1:C55.1 MUFF1:R48.1 MUFF1:R50.2 MUFF1:R52.2 MUFF1:R54.1 MUFF1:R55.1 MUFF1:R59.1 MUFF1:R60.1 MUFF1:R64.2 MUFF1:R65.1 MUFF1:R68.1 MUFF1:R69.P$1 R1.2 R5.2 R9.2 R13.2 R17.2 R21.2 R26.1 RAT1:C2.- RAT1:C3.- RAT1:C30.1 RAT1:C35.2 RAT1:C38.1 RAT1:C39.2 RAT1:D1.ANODE RAT1:D2.CATHODE RAT1:JP3.1 RAT1:R29.P$1 RAT1:R32.2 RAT1:R39.1 RAT1:R40.1 U$22.GND U$22.GND2 U$22.GND3 U$43.P$1 U$43.P$2 U$43.P$3 U$48.P$1 U$48.P$2 U$49.P$1 U$49.P$2 U$50.P$1 U$50.P$2 WAVESHAPER1:C1.1 WAVESHAPER1:C2.2 WAVESHAPER1:C3.1 WAVESHAPER1:C4.2 WAVESHAPER1:C5.1 WAVESHAPER1:C6.2 WAVESHAPER1:C24.1 WAVESHAPER1:C25.2 WAVESHAPER1:D1.CATHODE WAVESHAPER1:D3.CATHODE WAVESHAPER1:D5.CATHODE WAVESHAPER1:D9.CATHODE WAVESHAPER1:D10.CATHODE WAVESHAPER1:D11.ANODE WAVESHAPER1:D12.ANODE WAVESHAPER1:GND.P$1 WAVESHAPER1:IC1.5 WAVESHAPER1:IC1.10 WAVESHAPER1:IC3.7 WAVESHAPER1:IC3.10 WAVESHAPER1:IC5.3 WAVESHAPER1:IC5.5 WAVESHAPER1:J1.RING_B@1 WAVESHAPER1:J1.RING_T@3 WAVESHAPER1:J2.RING_B@1 WAVESHAPER1:J2.RING_T@3 WAVESHAPER1:J2.SWITCH_B@1 WAVESHAPER1:J2.SWITCH_T@3 WAVESHAPER1:J3.RING_B@1 WAVESHAPER1:J3.RING_T@3 WAVESHAPER1:J3.SWITCH_B@1 WAVESHAPER1:J3.SWITCH_T@3 WAVESHAPER1:R1.P$1 WAVESHAPER1:R2.P$1 WAVESHAPER1:R3.1 WAVESHAPER1:R4.2 WAVESHAPER1:R5.2 WAVESHAPER1:R7.1 WAVESHAPER1:R8.1 WAVESHAPER1:R24.2 WAVESHAPER1:R25.1 WAVESHAPER1:R26.1 WAVESHAPER1:R39.1 WAVESHAPER1:R47.P$1 WAVESHAPER1:U$3.P$2
INPUT_A: J6.TIP_B@1 J6.TIP_T@3 R3.2 U$22.P$3
INPUT_B: J4.TIP_B@1 J4.TIP_T@3 U$22.P$7
INPUT_C: J11.TIP_B@1 J11.TIP_T@3 U$22.P$11
INPUT_D: J14.TIP_B@1 J14.TIP_T@3 U$22.P$15
INPUT_E: J17.TIP_B@1 J17.TIP_T@3 U$22.P$19
INPUTS1:ENVELOPE_OUT: INPUTS1:R10.1
INPUTS1:EURORACK_IN: INPUTS1:J17.TIP_B@1 INPUTS1:J17.TIP_T@3 INPUTS1:R3.1
INPUTS1:GUITAR_IN: INPUTS1:C28.- INPUTS1:R22.2 INPUTS1:U$13.5 INPUTS1:U$13.6
INPUTS1:GUITAR_OUT: INPUTS1:R1.2 INPUTS1:R26.2
INPUTS1:MIX_OUT: INPUTS1:D15.A INPUTS1:IC2.1 INPUTS1:IC2.2 INPUTS1:R4.1
INPUTS1:N$1: INPUTS1:C4.2 INPUTS1:IC1.7 INPUTS1:R2.2 INPUTS1:R11.2
INPUTS1:N$2: INPUTS1:IC1.5 INPUTS1:R3.2
INPUTS1:N$3: INPUTS1:IC2.6 INPUTS1:IC2.7 INPUTS1:R10.2
INPUTS1:N$4: INPUTS1:IC5.4 INPUTS1:R6.1 INPUTS1:R7.1
INPUTS1:N$5: INPUTS1:IC5.3 INPUTS1:R4.2 INPUTS1:R5.2
INPUTS1:N$6: INPUTS1:IC5.5 INPUTS1:IC6.3 INPUTS1:R8.1
INPUTS1:N$7: INPUTS1:C22.1 INPUTS1:IC6.2 INPUTS1:R27.1
INPUTS1:N$8: INPUTS1:C3.+ INPUTS1:D15.C INPUTS1:IC2.5 INPUTS1:R9.2
INPUTS1:N$10: INPUTS1:C4.1 INPUTS1:IC1.6 INPUTS1:R11.1
INPUTS1:N$20: INPUTS1:C23.2 INPUTS1:C28.+ INPUTS1:IC1.3 INPUTS1:R23.2
INPUTS1:N$21: INPUTS1:C29.+ INPUTS1:R25.1
INPUTS1:N$22: INPUTS1:C24.1 INPUTS1:IC1.1 INPUTS1:R24.2 INPUTS1:R26.1
INPUTS1:N$23: INPUTS1:C24.2 INPUTS1:IC1.2 INPUTS1:R24.1 INPUTS1:R25.2
INPUTS1:N$32: INPUTS1:R7.2 INPUTS1:U$18.2
INPUTS1:N$33: INPUTS1:C22.2 INPUTS1:IC6.1 INPUTS1:R27.2 INPUTS1:R28.1
INPUTS1:N$36: INPUTS1:D17.A INPUTS1:IC6.7 INPUTS1:Q1.B
INPUTS1:N$37: INPUTS1:D17.C INPUTS1:IC6.6 INPUTS1:R31.1 INPUTS1:R32.2 INPUTS1:R33.2
INPUTS1:N$38: INPUTS1:Q1.E INPUTS1:R30.2 INPUTS1:R31.2
INPUTS1:N$39: INPUTS1:IC5.1 INPUTS1:Q1.C
INPUTS1:N$40: INPUTS1:R33.1 INPUTS1:U$17.2
INPUTS1:N$42: INPUTS1:R32.1 INPUTS1:R69.P$2
INPUTS1:VCA_CV_IN: INPUTS1:J1.TIP_B@1 INPUTS1:J1.TIP_T@3 INPUTS1:R69.P$3
INPUTS1:VCA_SIG_IN: INPUTS1:IC2.3 INPUTS1:R1.1 INPUTS1:R2.1
MASTERINPUT: INPUTS1:R28.2 J6.SWITCH_B@1 J6.SWITCH_T@3 WAVESHAPER1:R40.2 WAVESHAPER1:R42.1
MUFF1:N$1: MUFF1:C28.- MUFF1:R47.2
MUFF1:N$61: MUFF1:C28.+ MUFF1:C44.1 MUFF1:R48.2 MUFF1:R49.2 MUFF1:T1.B
MUFF1:N$62: MUFF1:R50.1 MUFF1:T1.E
MUFF1:N$63: MUFF1:C44.2 MUFF1:C45.1 MUFF1:R49.1 MUFF1:R51.2 MUFF1:T1.C
MUFF1:N$64: MUFF1:C45.2 MUFF1:R71.P$3
MUFF1:N$65: MUFF1:C1.- MUFF1:C47.1 MUFF1:R53.2 MUFF1:R54.2 MUFF1:R56.2 MUFF1:T2.B
MUFF1:N$66: MUFF1:C1.+ MUFF1:D1.ANODE MUFF1:D2.CATHODE
MUFF1:N$67: MUFF1:R55.2 MUFF1:T2.E
MUFF1:N$68: MUFF1:C47.2 MUFF1:C49.1 MUFF1:D1.CATHODE MUFF1:D2.ANODE MUFF1:R56.1 MUFF1:R57.2 MUFF1:T2.C
MUFF1:N$69: MUFF1:C49.2 MUFF1:R58.1
MUFF1:N$70: MUFF1:C2.- MUFF1:C50.1 MUFF1:R58.2 MUFF1:R59.2 MUFF1:R61.2 MUFF1:T3.B
MUFF1:N$71: MUFF1:R60.2 MUFF1:T3.E
MUFF1:N$72: MUFF1:C50.2 MUFF1:C52.1 MUFF1:D3.ANODE MUFF1:D4.CATHODE MUFF1:R61.1 MUFF1:R62.2 MUFF1:R63.1 MUFF1:T3.C
MUFF1:N$73: MUFF1:C53.1 MUFF1:R70.P$2
MUFF1:N$74: MUFF1:C55.2 MUFF1:R63.2 MUFF1:R70.P$1
MUFF1:N$75: MUFF1:C52.2 MUFF1:R64.1 MUFF1:R70.P$3
MUFF1:N$76: MUFF1:C2.+ MUFF1:D3.CATHODE MUFF1:D4.ANODE
MUFF1:N$77: MUFF1:C53.2 MUFF1:R65.2 MUFF1:R66.1 MUFF1:T4.B
MUFF1:N$78: MUFF1:C54.1 MUFF1:R67.1 MUFF1:T4.C
MUFF1:N$79: MUFF1:R68.2 MUFF1:T4.E
MUFF1:N$80: MUFF1:C54.2 MUFF1:R69.P$3
MUFF1:N$84: MUFF1:R52.1 MUFF1:R71.P$1
MUFF1:N$85: MUFF1:C46.2 MUFF1:R53.1
MUFF1:N$86: MUFF1:C46.1 MUFF1:R71.P$2
N$1: J1.TIP_B@1 J1.TIP_T@3 WAVESHAPER1:IC5.1 WAVESHAPER1:R43.1
N$2: D1.1 J2.9 J2.10
N$3: D2.2 J2.1 J2.2
N$4: DIST+1:C22.1 DIST+1:C23.1 U$22.P$4
N$5: DIST+1:R24.P$2 U$22.P$2
N$6: RAT1:C29.1 RAT1:R32.1 U$22.P$8
N$7: RAT1:R29.P$2 U$22.P$6
N$8: FUZZFACE1:C28.+ U$22.P$12
N$9: FUZZFACE1:R42.P$2 U$22.P$10
N$10: MUFF1:R47.1 U$22.P$16
N$11: MUFF1:R69.P$2 U$22.P$14
N$12: U$22.P$20 WAVESHAPER1:R37.2
N$13: U$22.P$18 WAVESHAPER1:R22.1 WAVESHAPER1:R23.1 WAVESHAPER1:WSOUT.P$1
N$15: IC2.5 R1.1 R2.1
N$16: IC2.6 R3.1 R4.2
N$18: IC2.7 J8.TIP_B@1 J8.TIP_T@3 R4.1
N$19: IC2.3 R5.1 R6.1
N$20: IC2.2 R7.1 R8.2
N$21: R6.2
N$22: R7.2
N$23: IC2.1 R8.1
N$24: IC2.10 R9.1 R10.1
N$25: IC2.9 R11.1 R12.2
N$26: R10.2
N$27: R11.2
N$28: IC2.8 R12.1
N$29: IC2.12 R13.1 R14.1
N$30: IC2.13 R15.1 R16.2
N$31: R14.2
N$32: R15.2
N$33: IC2.14 R16.1
N$34: IC6.5 R17.1 R18.1
N$35: IC6.6 R19.1 R20.2
N$36: R18.2
N$37: R19.2
N$38: IC6.7 R20.1
N$39: IC6.3 R21.1 R22.1
N$40: IC6.2 R23.1 R24.2
N$41: R22.2
N$42: R23.2
N$43: IC6.1 R24.1
OUTPUT_A: J4.SWITCH_B@1 J4.SWITCH_T@3 J7.TIP_B@1 J7.TIP_T@3 R2.2 U$22.P$1
OUTPUT_B: J9.TIP_B@1 J9.TIP_T@3 J11.SWITCH_B@1 J11.SWITCH_T@3 U$22.P$5
OUTPUT_C: J13.TIP_B@1 J13.TIP_T@3 J14.SWITCH_B@1 J14.SWITCH_T@3 U$22.P$9
OUTPUT_C1: J17.SWITCH_B@1 J17.SWITCH_T@3
OUTPUT_D: J16.TIP_B@1 J16.TIP_T@3 U$22.P$13
OUTPUT_E: J3.TIP_B@1 J3.TIP_T@3 J19.TIP_B@1 J19.TIP_T@3 U$22.P$17 WAVESHAPER1:R41.2
RAT1:N$37: RAT1:C29.2 RAT1:JP1.2 RAT1:R33.1
RAT1:N$38: RAT1:C30.2 RAT1:IC6.3 RAT1:R33.2
RAT1:N$39: RAT1:IC6.7 RAT1:JP2.2
RAT1:N$40: RAT1:IC6.4 RAT1:JP3.2
RAT1:N$41: RAT1:JP1.1 RAT1:R34.1
RAT1:N$42: RAT1:C31.1 RAT1:IC6.2 RAT1:R31.P$1 RAT1:R31.P$2 RAT1:R35.2 RAT1:R36.2
RAT1:N$43: RAT1:C1.+ RAT1:C31.2 RAT1:IC6.6 RAT1:R31.P$3
RAT1:N$44: RAT1:C1.- RAT1:R37.1
RAT1:N$45: RAT1:D1.CATHODE RAT1:D2.ANODE RAT1:R30.P$1 RAT1:R30.P$2 RAT1:R37.2
RAT1:N$46: RAT1:R30.P$3 RAT1:R38.1
RAT1:N$47: RAT1:C2.+ RAT1:R36.1
RAT1:N$48: RAT1:C3.+ RAT1:R35.1
RAT1:N$49: RAT1:C35.1 RAT1:C36.1 RAT1:R38.2
RAT1:N$50: RAT1:C36.2 RAT1:Q1.3 RAT1:R39.2
RAT1:N$51: RAT1:C28.+ RAT1:Q1.2 RAT1:R40.2
RAT1:N$52: RAT1:C28.- RAT1:R29.P$3
VCA1:12V: VCA1:C1.2 VCA1:C9.2 VCA1:IC5.11 VCA1:IC6.8 VCA1:U$7.3 VCA1:U$8.3
VCA1:-12V: VCA1:C2.1 VCA1:C10.1 VCA1:IC5.6 VCA1:IC6.4 VCA1:U$7.1 VCA1:U$8.1
VCA1:GND: VCA1:C1.1 VCA1:C2.2 VCA1:C9.1 VCA1:C10.2 VCA1:IC6.5 VCA1:R23.1 VCA1:R24.2 VCA1:R26.2 VCA1:R30.1 VCA1:R69.P$1
VCA1:N$20: VCA1:IC5.4 VCA1:R24.1 VCA1:R25.1
VCA1:N$21: VCA1:IC5.3 VCA1:R22.2 VCA1:R23.2
VCA1:N$22: VCA1:IC5.5 VCA1:IC6.3 VCA1:R26.1
VCA1:N$23: VCA1:C22.1 VCA1:IC6.2 VCA1:R27.1
VCA1:N$32: VCA1:R25.2 VCA1:U$7.2
VCA1:N$33: VCA1:C22.2 VCA1:IC6.1 VCA1:R27.2 VCA1:R28.1
VCA1:N$36: VCA1:D17.A VCA1:IC6.7 VCA1:Q1.B
VCA1:N$37: VCA1:D17.C VCA1:IC6.6 VCA1:R31.1 VCA1:R32.2 VCA1:R33.2
VCA1:N$38: VCA1:Q1.E VCA1:R30.2 VCA1:R31.2
VCA1:N$39: VCA1:IC5.1 VCA1:Q1.C
VCA1:N$40: VCA1:R33.1 VCA1:U$8.2
VCA1:N$42: VCA1:R32.1 VCA1:R69.P$2
VCA1:VCA_CV_IN: VCA1:R69.P$3
VCA1:VCA_OUTPUT: VCA1:R28.2
VCA1:VCA_SIG_IN: VCA1:R22.1
WAVESHAPER1:BIASINPUT: WAVESHAPER1:J2.TIP_B@1 WAVESHAPER1:J2.TIP_T@3 WAVESHAPER1:R14.2
WAVESHAPER1:BIASMAINLINE: WAVESHAPER1:C7.1 WAVESHAPER1:D2.ANODE WAVESHAPER1:D4.ANODE WAVESHAPER1:D6.ANODE WAVESHAPER1:D7.ANODE WAVESHAPER1:D8.ANODE WAVESHAPER1:IC1.8 WAVESHAPER1:R13.1
WAVESHAPER1:CV_IN: WAVESHAPER1:J3.TIP_B@1 WAVESHAPER1:J3.TIP_T@3 WAVESHAPER1:R45.2
WAVESHAPER1:N$1: WAVESHAPER1:R4.1 WAVESHAPER1:U$11.P$3
WAVESHAPER1:N$2: WAVESHAPER1:IC3.13 WAVESHAPER1:R3.2 WAVESHAPER1:R40.1
WAVESHAPER1:N$3: WAVESHAPER1:C7.2 WAVESHAPER1:IC1.9 WAVESHAPER1:R13.2 WAVESHAPER1:R14.1
WAVESHAPER1:N$4: WAVESHAPER1:IC3.14 WAVESHAPER1:R39.2 WAVESHAPER1:R41.1
WAVESHAPER1:N$5: WAVESHAPER1:R1.P$2 WAVESHAPER1:R10.2
WAVESHAPER1:N$6: WAVESHAPER1:J1.TIP_B@1 WAVESHAPER1:J1.TIP_T@3 WAVESHAPER1:R1.P$3
WAVESHAPER1:N$7: WAVESHAPER1:D12.CATHODE WAVESHAPER1:R10.1 WAVESHAPER1:R11.1 WAVESHAPER1:R12.2 WAVESHAPER1:T1.E
WAVESHAPER1:N$8: WAVESHAPER1:R2.P$2 WAVESHAPER1:R11.2
WAVESHAPER1:N$9: WAVESHAPER1:C13.2 WAVESHAPER1:R26.2 WAVESHAPER1:R27.2 WAVESHAPER1:U$11.P$1 WAVESHAPER1:U$11.P$2
WAVESHAPER1:N$10: WAVESHAPER1:R6.1 WAVESHAPER1:T1.C
WAVESHAPER1:N$11: WAVESHAPER1:C8.1 WAVESHAPER1:IC1.7 WAVESHAPER1:R15.1 WAVESHAPER1:R16.2 WAVESHAPER1:R17.2
WAVESHAPER1:N$12: WAVESHAPER1:C8.2 WAVESHAPER1:C14.2 WAVESHAPER1:IC1.6 WAVESHAPER1:R15.2
WAVESHAPER1:N$13: WAVESHAPER1:C14.1 WAVESHAPER1:IC3.5 WAVESHAPER1:R5.1
WAVESHAPER1:N$14: WAVESHAPER1:D3.ANODE WAVESHAPER1:D4.CATHODE WAVESHAPER1:IC2.3 WAVESHAPER1:R16.1
WAVESHAPER1:N$15: WAVESHAPER1:C9.1 WAVESHAPER1:IC2.1 WAVESHAPER1:R18.1 WAVESHAPER1:R31.2 WAVESHAPER1:R32.2
WAVESHAPER1:N$16: WAVESHAPER1:D5.ANODE WAVESHAPER1:D6.CATHODE WAVESHAPER1:IC2.5 WAVESHAPER1:R31.1
WAVESHAPER1:N$17: WAVESHAPER1:C9.2 WAVESHAPER1:IC2.2 WAVESHAPER1:R17.1 WAVESHAPER1:R18.2
WAVESHAPER1:N$18: WAVESHAPER1:C11.2 WAVESHAPER1:IC2.9 WAVESHAPER1:R20.1 WAVESHAPER1:R36.2
WAVESHAPER1:N$19: WAVESHAPER1:C16.1 WAVESHAPER1:IC1.1 WAVESHAPER1:R27.1 WAVESHAPER1:R28.2 WAVESHAPER1:U$3.P$1
WAVESHAPER1:N$20: WAVESHAPER1:D8.CATHODE WAVESHAPER1:D9.ANODE WAVESHAPER1:IC2.12 WAVESHAPER1:R34.1
WAVESHAPER1:N$21: WAVESHAPER1:C10.2 WAVESHAPER1:IC2.6 WAVESHAPER1:R19.2 WAVESHAPER1:R32.1
WAVESHAPER1:N$22: WAVESHAPER1:C10.1 WAVESHAPER1:IC2.7 WAVESHAPER1:R19.1 WAVESHAPER1:R20.2 WAVESHAPER1:R33.2
WAVESHAPER1:N$23: WAVESHAPER1:D7.CATHODE WAVESHAPER1:D10.ANODE WAVESHAPER1:IC2.10 WAVESHAPER1:R33.1
WAVESHAPER1:N$24: WAVESHAPER1:C11.1 WAVESHAPER1:IC2.8 WAVESHAPER1:R34.2 WAVESHAPER1:R35.2 WAVESHAPER1:R36.1
WAVESHAPER1:N$25: WAVESHAPER1:C13.1 WAVESHAPER1:IC1.12 WAVESHAPER1:R25.2
WAVESHAPER1:N$26: WAVESHAPER1:C15.2 WAVESHAPER1:IC2.13 WAVESHAPER1:R21.2 WAVESHAPER1:R35.1
WAVESHAPER1:N$27: WAVESHAPER1:C15.1 WAVESHAPER1:IC2.14 WAVESHAPER1:R21.1 WAVESHAPER1:R29.1 WAVESHAPER1:R30.1
WAVESHAPER1:N$28: WAVESHAPER1:D1.ANODE WAVESHAPER1:D2.CATHODE WAVESHAPER1:IC1.3 WAVESHAPER1:R29.2
WAVESHAPER1:N$29: WAVESHAPER1:C12.1 WAVESHAPER1:IC1.14 WAVESHAPER1:R22.2
WAVESHAPER1:N$30: WAVESHAPER1:C16.2 WAVESHAPER1:IC1.2 WAVESHAPER1:R28.1 WAVESHAPER1:R30.2
WAVESHAPER1:N$31: WAVESHAPER1:IC3.12 WAVESHAPER1:IC5.2 WAVESHAPER1:R42.2 WAVESHAPER1:R43.2
WAVESHAPER1:N$32: WAVESHAPER1:C12.2 WAVESHAPER1:IC1.13 WAVESHAPER1:R23.2 WAVESHAPER1:R24.1
WAVESHAPER1:N$33: WAVESHAPER1:D11.CATHODE WAVESHAPER1:R9.1 WAVESHAPER1:T1.B
WAVESHAPER1:N$34: WAVESHAPER1:IC3.1 WAVESHAPER1:R6.2
WAVESHAPER1:N$35: WAVESHAPER1:IC3.16 WAVESHAPER1:Q2.C
WAVESHAPER1:N$36: WAVESHAPER1:IC3.3 WAVESHAPER1:R7.2 WAVESHAPER1:R37.1
WAVESHAPER1:N$37: WAVESHAPER1:R38.2 WAVESHAPER1:U$24.2
WAVESHAPER1:N$38: WAVESHAPER1:IC3.4 WAVESHAPER1:R8.2 WAVESHAPER1:R38.1
WAVESHAPER1:N$39: WAVESHAPER1:IC5.6 WAVESHAPER1:R44.2 WAVESHAPER1:R45.1 WAVESHAPER1:R46.1
WAVESHAPER1:N$40: WAVESHAPER1:Q2.E WAVESHAPER1:R44.1
WAVESHAPER1:N$41: WAVESHAPER1:IC5.7 WAVESHAPER1:Q2.B
WAVESHAPER1:N$42: WAVESHAPER1:R46.2 WAVESHAPER1:R47.P$2
WAVESHAPER1:N$43: WAVESHAPER1:R47.P$3 WAVESHAPER1:R48.2

## Tracks (layer width: path | path; a pad name or v marks a point on that pad's centre or on a via)
4.5V  (4 unrouted)
9V  (17 unrouted)
12V  (37 unrouted)
-12V  (32 unrouted)
DIST+1:N$20  (1 unrouted)
DIST+1:N$21  (2 unrouted)
DIST+1:N$22  (2 unrouted)
DIST+1:N$23  (1 unrouted)
DIST+1:N$32  (2 unrouted)
DIST+1:N$33  (1 unrouted)
DIST+1:N$34  (4 unrouted)
DIST+1:N$35  (1 unrouted)
DIST+1:N$36  (2 unrouted)
DIST+1:N$81  (1 unrouted)
DIST+1:N$82  (1 unrouted)
DIST+1:N$87  (1 unrouted)
FUZZFACE1:N$53  (3 unrouted)
FUZZFACE1:N$54  (3 unrouted)
FUZZFACE1:N$55  (4 unrouted)
FUZZFACE1:N$56  (1 unrouted)
FUZZFACE1:N$57  (1 unrouted)
FUZZFACE1:N$58  (2 unrouted)
FUZZFACE1:N$59  (2 unrouted)
GND  (153 unrouted)
INPUT_A  (2 unrouted)
INPUT_B  (1 unrouted)
INPUT_C  (1 unrouted)
INPUT_D  (1 unrouted)
INPUT_E  (1 unrouted)
INPUTS1:EURORACK_IN  (1 unrouted)
INPUTS1:GUITAR_IN  (3 unrouted)
INPUTS1:GUITAR_OUT  (1 unrouted)
INPUTS1:MIX_OUT  (3 unrouted)
INPUTS1:N$1  (3 unrouted)
INPUTS1:N$2  (1 unrouted)
INPUTS1:N$3  (2 unrouted)
INPUTS1:N$4  (2 unrouted)
INPUTS1:N$5  (2 unrouted)
INPUTS1:N$6  (2 unrouted)
INPUTS1:N$7  (2 unrouted)
INPUTS1:N$8  (3 unrouted)
INPUTS1:N$10  (2 unrouted)
INPUTS1:N$20  (3 unrouted)
INPUTS1:N$21  (1 unrouted)
INPUTS1:N$22  (3 unrouted)
INPUTS1:N$23  (3 unrouted)
INPUTS1:N$32  (1 unrouted)
INPUTS1:N$33  (3 unrouted)
INPUTS1:N$36  (2 unrouted)
INPUTS1:N$37  (4 unrouted)
INPUTS1:N$38  (2 unrouted)
INPUTS1:N$39  (1 unrouted)
INPUTS1:N$40  (1 unrouted)
INPUTS1:N$42  (1 unrouted)
INPUTS1:VCA_CV_IN  (1 unrouted)
INPUTS1:VCA_SIG_IN  (2 unrouted)
MASTERINPUT  (3 unrouted)
MUFF1:N$1  (1 unrouted)
MUFF1:N$61  (4 unrouted)
MUFF1:N$62  (1 unrouted)
MUFF1:N$63  (4 unrouted)
MUFF1:N$64  (1 unrouted)
MUFF1:N$65  (5 unrouted)
MUFF1:N$66  (2 unrouted)
MUFF1:N$67  (1 unrouted)
MUFF1:N$68  (6 unrouted)
MUFF1:N$69  (1 unrouted)
MUFF1:N$70  (5 unrouted)
MUFF1:N$71  (1 unrouted)
MUFF1:N$72  (7 unrouted)
MUFF1:N$73  (1 unrouted)
MUFF1:N$74  (2 unrouted)
MUFF1:N$75  (2 unrouted)
MUFF1:N$76  (2 unrouted)
MUFF1:N$77  (3 unrouted)
MUFF1:N$78  (2 unrouted)
MUFF1:N$79  (1 unrouted)
MUFF1:N$80  (1 unrouted)
MUFF1:N$84  (1 unrouted)
MUFF1:N$85  (1 unrouted)
MUFF1:N$86  (1 unrouted)
N$1  (2 unrouted)
N$2  (2 unrouted)
N$3  (2 unrouted)
N$4  (2 unrouted)
N$5  (1 unrouted)
N$6  (2 unrouted)
N$7  (1 unrouted)
N$8  (1 unrouted)
N$9  (1 unrouted)
N$10  (1 unrouted)
N$11  (1 unrouted)
N$12  (1 unrouted)
N$13  (3 unrouted)
N$15  (2 unrouted)
N$16  (2 unrouted)
N$18  (2 unrouted)
N$19  (2 unrouted)
N$20  (2 unrouted)
N$23  (1 unrouted)
N$24  (2 unrouted)
N$25  (2 unrouted)
N$28  (1 unrouted)
N$29  (2 unrouted)
N$30  (2 unrouted)
N$33  (1 unrouted)
N$34  (2 unrouted)
N$35  (2 unrouted)
N$38  (1 unrouted)
N$39  (2 unrouted)
N$40  (2 unrouted)
N$43  (1 unrouted)
OUTPUT_A  (3 unrouted)
OUTPUT_B  (2 unrouted)
OUTPUT_C  (2 unrouted)
OUTPUT_D  (1 unrouted)
OUTPUT_E  (3 unrouted)
RAT1:N$37  (2 unrouted)
RAT1:N$38  (2 unrouted)
RAT1:N$39  (1 unrouted)
RAT1:N$40  (1 unrouted)
RAT1:N$41  (1 unrouted)
RAT1:N$42  (5 unrouted)
RAT1:N$43  (3 unrouted)
RAT1:N$44  (1 unrouted)
RAT1:N$45  (4 unrouted)
RAT1:N$46  (1 unrouted)
RAT1:N$47  (1 unrouted)
RAT1:N$48  (1 unrouted)
RAT1:N$49  (2 unrouted)
RAT1:N$50  (2 unrouted)
RAT1:N$51  (2 unrouted)
RAT1:N$52  (1 unrouted)
VCA1:12V  (5 unrouted)
VCA1:-12V  (5 unrouted)
VCA1:GND  (9 unrouted)
VCA1:N$20  (2 unrouted)
VCA1:N$21  (2 unrouted)
VCA1:N$22  (2 unrouted)
VCA1:N$23  (2 unrouted)
VCA1:N$32  (1 unrouted)
VCA1:N$33  (3 unrouted)
VCA1:N$36  (2 unrouted)
VCA1:N$37  (4 unrouted)
VCA1:N$38  (2 unrouted)
VCA1:N$39  (1 unrouted)
VCA1:N$40  (1 unrouted)
VCA1:N$42  (1 unrouted)
WAVESHAPER1:BIASINPUT  (1 unrouted)
WAVESHAPER1:BIASMAINLINE  (7 unrouted)
WAVESHAPER1:CV_IN  (1 unrouted)
WAVESHAPER1:N$1  (1 unrouted)
WAVESHAPER1:N$2  (2 unrouted)
WAVESHAPER1:N$3  (3 unrouted)
WAVESHAPER1:N$4  (2 unrouted)
WAVESHAPER1:N$5  (1 unrouted)
WAVESHAPER1:N$6  (1 unrouted)
WAVESHAPER1:N$7  (4 unrouted)
WAVESHAPER1:N$8  (1 unrouted)
WAVESHAPER1:N$9  (4 unrouted)
WAVESHAPER1:N$10  (1 unrouted)
WAVESHAPER1:N$11  (4 unrouted)
WAVESHAPER1:N$12  (3 unrouted)
WAVESHAPER1:N$13  (2 unrouted)
WAVESHAPER1:N$14  (3 unrouted)
WAVESHAPER1:N$15  (4 unrouted)
WAVESHAPER1:N$16  (3 unrouted)
WAVESHAPER1:N$17  (3 unrouted)
WAVESHAPER1:N$18  (3 unrouted)
WAVESHAPER1:N$19  (4 unrouted)
WAVESHAPER1:N$20  (3 unrouted)
WAVESHAPER1:N$21  (3 unrouted)
WAVESHAPER1:N$22  (4 unrouted)
WAVESHAPER1:N$23  (3 unrouted)
WAVESHAPER1:N$24  (4 unrouted)
WAVESHAPER1:N$25  (2 unrouted)
WAVESHAPER1:N$26  (3 unrouted)
WAVESHAPER1:N$27  (4 unrouted)
WAVESHAPER1:N$28  (3 unrouted)
WAVESHAPER1:N$29  (2 unrouted)
WAVESHAPER1:N$30  (3 unrouted)
WAVESHAPER1:N$31  (3 unrouted)
WAVESHAPER1:N$32  (3 unrouted)
WAVESHAPER1:N$33  (2 unrouted)
WAVESHAPER1:N$34  (1 unrouted)
WAVESHAPER1:N$35  (1 unrouted)
WAVESHAPER1:N$36  (2 unrouted)
WAVESHAPER1:N$37  (1 unrouted)
WAVESHAPER1:N$38  (2 unrouted)
WAVESHAPER1:N$39  (3 unrouted)
WAVESHAPER1:N$40  (1 unrouted)
WAVESHAPER1:N$41  (1 unrouted)
WAVESHAPER1:N$42  (1 unrouted)
WAVESHAPER1:N$43  (1 unrouted)